# Altium PCB JacdacTactEcBc30 132.PcbDoc
Units mm, origin at the board's own origin, x right, y up, seen from the top; angles counter-clockwise.
Board outline 16.5 x 25 mm, 2 copper layers (Top Layer, Bottom Layer), stack 1.525 mm thick; 20 components, 10 nets, 61 pads, 11 vias.
Unrouted connection lines stored in the file: 10.
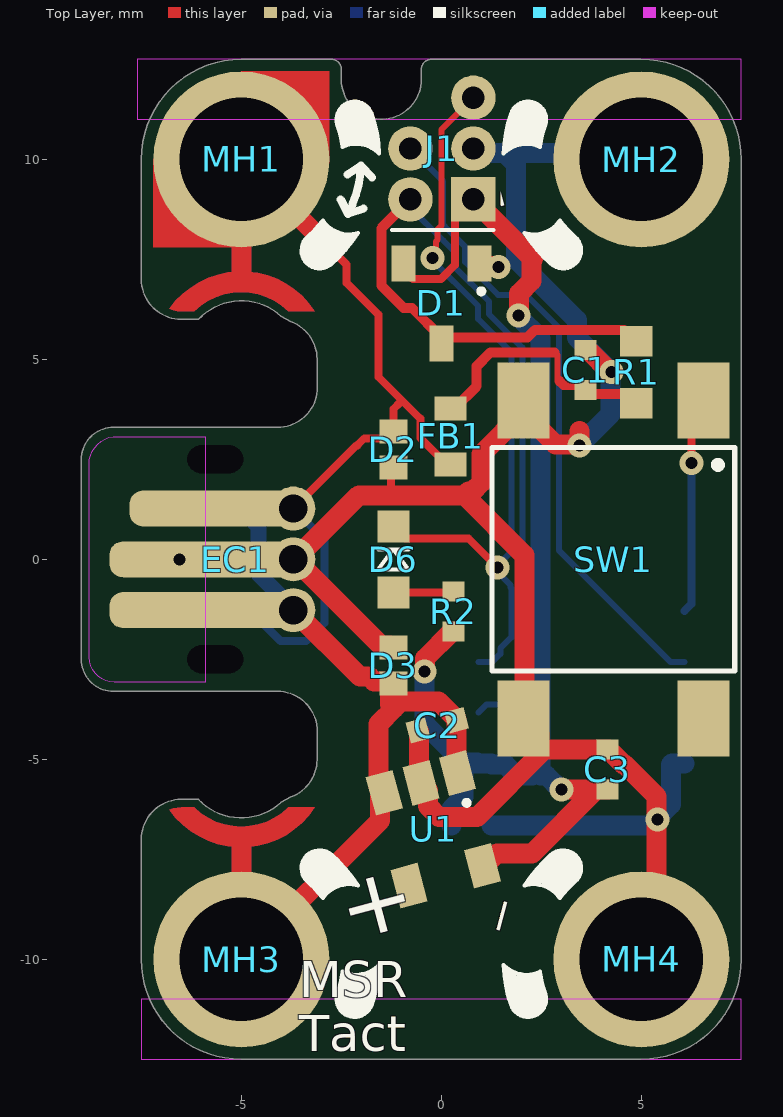
[diagram p0: Top Layer view]
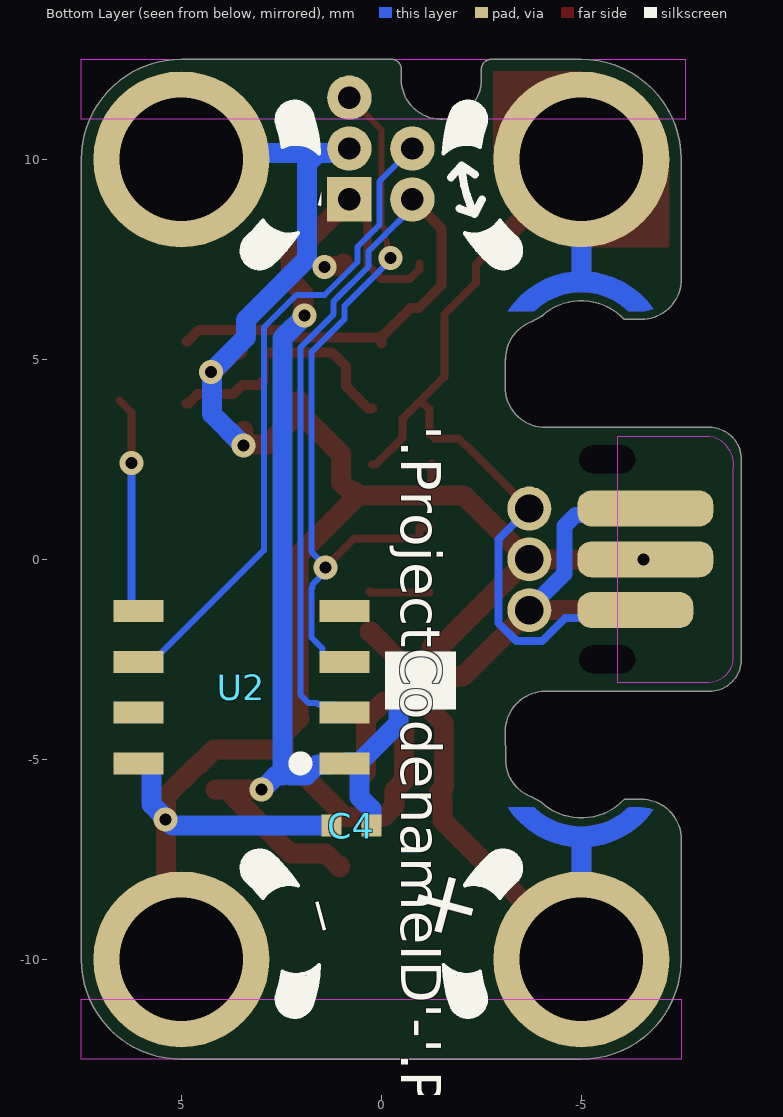
[diagram p1: Bottom Layer view, seen from below]
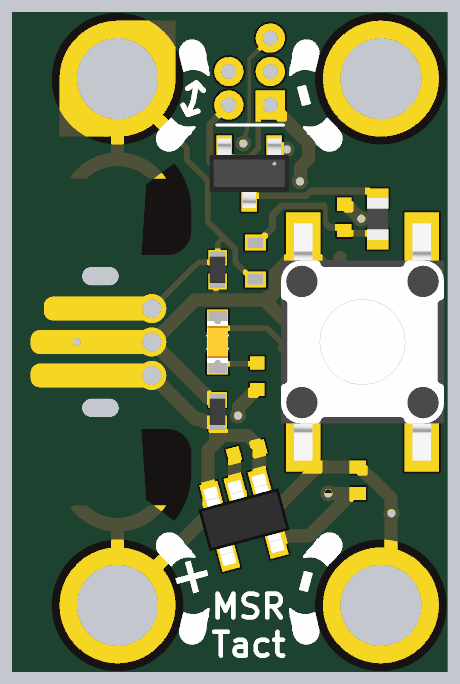
[diagram p2: 3D render of the assembled board from above, using the file's embedded part models]

## Layer stack, top to bottom
Top Solder: solder mask 0.0102, Solder Resist, Dk 3.5
Top Layer: signal copper 0.0356
Dielectric 1: core 1.454, FR-4, Dk 4.2
Bottom Layer: signal copper 0.0356
Bottom Solder: solder mask 0.0102, Solder Resist, Dk 3.5

## Board outline
-7.5,-10 -7.5,-6.97 -7.5,-7 cw(c-6.5,-7) -6.5,-6 -6.5,-6.001 -6.069,-6.001 ccw(c-5,-5) -4.009,-6.079 -4.01,-6.077 -3.76,-5.94 ccw(c-4.099,-5.007) -3.107,-5.007 -3.1,-4.3 ccw(c-4.1,-4.3) -4.1,-3.3 -8.2,-3.3 cw(c-8.2,-2.5) -9,-2.5 -9,2.5 cw(c-8.2,2.5) -8.2,3.3 -4.1,3.3 -4.098,3.3 ccw(c-4.098,4.3) -3.098,4.3 -3.1,4.3 -3.1,5 -3.107,5.007 ccw(c-4.099,5.007) -3.76,5.94 -4.01,6.077 -4.009,6.079 ccw(c-5,5) -6.069,6.001 -6.5,6.001 -6.5,6 cw(c-6.5,7) -7.5,7 -7.5,6.97 -7.5,10 cw(c-5,10) -5,12.5 -2.75,12.5 cw(c-2.75,12.25) -2.5,12.25 -2.5,12 ccw(c-1.5,12) -0.5,12 -0.5,12.25 cw(c-0.25,12.25) -0.25,12.5 5,12.5 cw(c5,10) 7.5,10 7.5,-10 cw(c5,-10) 5,-12.5 -5,-12.5 cw(c-5,-10)

## Design rules (kind name [scope] priority, off if disabled: settings)
AssemblyTestPointUsage [All] p1: valid=2
BoardOutlineClearance [Not (OnLayer('Component Keepout'))] p1: gap=0.3 ignorepadtopadclearanceinfootprint=FALSE except(0: Arc-SplitContinuation Track-SplitContinuation SMDPad-SplitContinuation THPad-SplitContinuation Via-SplitContinuation Fill-SplitContinuation Poly-SplitContinuation Region-OutlineEdge Region-SplitContinuation Text-OutlineEdge Text-SplitContinuation; 0.2: Track-OutlineEdge Fill-CavityEdge Fill-CutoutEdge Fill-SplitBarrior Poly-CavityEdge Poly-CutoutEdge Poly-SplitBarrior Text-CavityEdge Text-CutoutEdge Text-SplitBarrior; 0.25: SMDPad-OutlineEdge)
Clearance [All] p1: gap=0.125 ignorepadtopadclearanceinfootprint=FALSE except(0: Arc-Hole Track-Hole SMDPad-Hole THPad-Hole Via-Hole Fill-Hole Poly-Hole Region-Hole Text-Hole)
ComponentClearance [All] p1: gap=0.1 collisioncheckmode=3 verticalgap=0.254 showdistances=FALSE
DiffPairsRouting [All] p1: maxlimit=2 minlimit=0.15 mostfreqgap=0.15 toplayer_minwidth=0.15 toplayer_maxwidth=2 toplayer_prefwidth=0.15 bottomlayer_minwidth=0.15 bottomlayer_maxwidth=2 bottomlayer_prefwidth=0.15 substack1={CB9D278B-8BF5-444A-AAF4-837A2A9DF42D} toplayer_{cb9d278b-8bf5-444a-aaf4-837a2a9df42d}_minwidth=0.381 toplayer_{cb9d278b-8bf5-444a-aaf4-837a2a9df42d}_maxwidth=0.381 toplayer_{cb9d278b-8bf5-444a-aaf4-837a2a9df42d}_prefwidth=0.381 bottomlayer_{cb9d278b-8bf5-444a-aaf4-837a2a9df42d}_minwidth=0.381 bottomlayer_{cb9d278b-8bf5-444a-aaf4-837a2a9df42d}_maxwidth=0.381 bottomlayer_{cb9d278b-8bf5-444a-aaf4-837a2a9df42d}_prefwidth=0.381 substack2={826B8647-A721-4255-895A-19F9591B9CD1} toplayer_{826b8647-a721-4255-895a-19f9591b9cd1}_minwidth=0.381 toplayer_{826b8647-a721-4255-895a-19f9591b9cd1}_maxwidth=0.381 toplayer_{826b8647-a721-4255-895a-19f9591b9cd1}_prefwidth=0.381 bottomlayer_{826b8647-a721-4255-895a-19f9591b9cd1}_minwidth=0.381 bottomlayer_{826b8647-a721-4255-895a-19f9591b9cd1}_maxwidth=0.381 bottomlayer_{826b8647-a721-4255-895a-19f9591b9cd1}_prefwidth=0.381 substack3={E64FCAF4-1BC8-437D-B1E0-0E5F2DC0F59E} toplayer_{e64fcaf4-1bc8-437d-b1e0-0e5f2dc0f59e}_minwidth=0.381 toplayer_{e64fcaf4-1bc8-437d-b1e0-0e5f2dc0f59e}_maxwidth=0.381 toplayer_{e64fcaf4-1bc8-437d-b1e0-0e5f2dc0f59e}_prefwidth=0.381 bottomlayer_{e64fcaf4-1bc8-437d-b1e0-0e5f2dc0f59e}_minwidth=0.381 bottomlayer_{e64fcaf4-1bc8-437d-b1e0-0e5f2dc0f59e}_maxwidth=0.381 bottomlayer_{e64fcaf4-1bc8-437d-b1e0-0e5f2dc0f59e}_prefwidth=0.381 substack4={E61CE66C-507C-4E1E-8E83-C905434AFC1C} toplayer_{e61ce66c-507c-4e1e-8e83-c905434afc1c}_minwidth=0.381 toplayer_{e61ce66c-507c-4e1e-8e83-c905434afc1c}_maxwidth=0.381 toplayer_{e61ce66c-507c-4e1e-8e83-c905434afc1c}_prefwidth=0.381 bottomlayer_{e61ce66c-507c-4e1e-8e83-c905434afc1c}_minwidth=0.381 bottomlayer_{e61ce66c-507c-4e1e-8e83-c905434afc1c}_maxwidth=0.381 bottomlayer_{e61ce66c-507c-4e1e-8e83-c905434afc1c}_prefwidth=0.381 maxuncoupledlength=25
FabricationTestPointUsage [All] p1: valid=2 allowmultiple=FALSE
HoleSize [All] p1: absolutevalues=TRUE maxlimit=3.1 minlimit=0.2 maxpercent=80.000 minpercent=20.000
MinimumSolderMaskSliver [All] p1: minsoldermaskwidth=0.005
PasteMaskExpansion [All] p1: expansion=-35 percent=-35.000000
PlaneClearance [All] p1: clearance=0.3
PlaneConnect [All] p1: planeconnectstyle=Relief reliefexpansion=0.5 reliefentries=4 reliefconductorwidth=0.2 reliefairgap=0.3
PolygonConnect "PolygonConnect GND" [isVIA] p1: connectstyle=Relief reliefconductorwidth=0.2 reliefentries=4 polygonreliefangle="90 Angle" airgapwidth=0.2
PolygonConnect [All] p2: connectstyle=Relief reliefconductorwidth=0.2 reliefentries=4 polygonreliefangle="90 Angle" airgapwidth=0.2
RoutingVias [All] p1: holewidth=0.3 width=0.6 viastyle="Through Hole" minholewidth=0.3 minwidth=0.6 maxholewidth=0.5 maxwidth=0.8
SilkToSilkClearance [All] p1: silktosilkclearance=0.001
SilkToSolderMaskClearance [IsPad] p1: minsilkscreentomaskgap=0.05 clearancetoexposedcopper=TRUE
SolderMaskExpansion [All] p1: expansion=0.075 istentingtop=FALSE
Width [All] p1: maxlimit=2 minlimit=0.15 preferedwidth=0.15 substack1={CB9D278B-8BF5-444A-AAF4-837A2A9DF42D} substack2={826B8647-A721-4255-895A-19F9591B9CD1} substack3={E64FCAF4-1BC8-437D-B1E0-0E5F2DC0F59E} substack4={E61CE66C-507C-4E1E-8E83-C905434AFC1C} minimp=50.000000 maximp=50.000000 favimp=50.000000
19 further rules are at their usual default settings.

## Components (designator, comment, footprint, x,y, rotation, side; value= is the part's Value field where it differs from the comment)
C1 "CL05C330JB5NNNC" "C0402_0.55MM - without outline" 3.601,4.733 r270 top
C2 "CL05A105KP5NNNC" "C0402_0.55MM - without outline" -0.1,-4.15 r15 top
C3 "CL05A105KP5NNNC" "C0402_0.55MM - without outline" 4.15,-5.25 r270 top
C4 "CL05A105KP5NNNC" "C0402_0.55MM - without outline" 0.751,-6.657 r180 bottom
D1 "BAT54S" "NXP-BAT54S-TO-236AB - WITHOUT OUTLINE" 0,6.4 r270 top
D2 "RCLAMP0521P-N" "TVS 0402 - XL" -1.2,2.75 r270 top
D3 "RCLAMP0521P-N" "TVS 0402 - XL" -1.2,-2.65 r90 top
D6 "Everlight Elec'''" "0603 Orange - without outline" -1.2,0 r270 top
EC1 "3 pin JACDAC edge connector" JACDAC_EDGE_CONNECTOR_NO_TRACES_3D_PADS -3.15,0 r90 top
FB1 "TDK MPZ1608S102ATA00" "TDK MPZ1608 0.8mm - without outline" 0.23,3.075 r90 top
J1 "Hack Connect Mini 1.27 mm pitch 2-row" HACK_CONNECT_MINI_5_X_1_27_0.559mm_TH 0.8,9 r0 top
MH1 "MH_7.0MMK_4.4MMC_3.1MMD_PTH" MH_7.0MMK_4.4MMC_3.1MMD_PTH-SILK_D -5,10 r30 top
MH2 "MH_7.0MMK_4.4MMC_3.1MMD_PTH" MH_7.0MMK_4.4MMC_3.1MMD_PTH-SILK_G 5,10 r60 top
MH3 "MH_7.0MMK_4.4MMC_3.1MMD_PTH" MH_7.0MMK_4.4MMC_3.1MMD_PTH-SILK_P -5,-10 r330 top
MH4 "MH_7.0MMK_4.4MMC_3.1MMD_PTH" MH_7.0MMK_4.4MMC_3.1MMD_PTH-SILK_G 5,-10 r30 top
R1 "220R" RC0603 4.876,4.672 r270 top
R2 "RC0402FR-071KL" "R0402 - Without outline" 0.301,-1.3 r270 top
SW1 "Tact Wurth 430152050826" "Wurth 430152050836-WIDE" 4.3,0 r270 top
U1 "LDO 3.3V/300 mA" "ON_SEMI-SOT23-5 - WITHOUT OUTLINE" -0.2,-6.75 r285 top
U2 "PFS122-S08" SOP-8 3.5,-3.2 r0 bottom

## Footprints (in the part's own frame and the unit in brackets; to place one, negate y for a bottom-side part, rotate by r counter-clockwise, add the part's x,y. Pads: shape width x height; smd on the part's side, far side on the other; paste and mask are expansions set on the pad)
"0603 Orange - without outline" [mm]
  rect 0.8x0.8 smd paste-0.05: 1(-0.825,0) 2(0.825,0)
  silkscreen extent -0.25,-0.38 0.25,0.38, body extent -0.8,-0.4 0.8,0.4, height 0.54
"C0402_0.55MM - without outline" [mm]
  rect 0.5x0.55 smd: 1(-0.5,0) 2(0.5,0)
  body extent -0.5,-0.25 0.5,0.25, height 0.55
HACK_CONNECT_MINI_5_X_1_27_0.559mm_TH [mm] "50mil by 62mil pitch 22mil TH"
  rect 1.11x1.11 hole 0.559: 1(0,0)
  round 1.11 hole 0.559: 2(-1.575,0) 3(0,1.27) 4(-1.575,1.27) 5(0,2.54)
  silkscreen extent -2.03,-0.76 0.51,-0.76
JACDAC_EDGE_CONNECTOR_NO_TRACES_3D_PADS [mm] "Jacdac 3 pin connector with no traces and with 3D bodies for the copper"
  rrect78% 0.9x2.9 smd far side paste-1 mask+0: 1(-1.27,3.2)
  rrect78% 0.9x4.3 smd paste-1 mask+0: 1(1.27,2.5)
  round 1.1 hole 0.71 paste-0.254 mask+0: 1(1.27,0.55) 2(0,0.55) 3(-1.27,0.55)
  rrect78% 0.9x3.4 smd far side paste-1 mask+0: 2(0,3.45) 2(0,3.45) 3(1.27,3.45)
  rrect78% 0.9x4.8 smd paste-1 mask+0: 2(0,2.75) 3(-1.27,2.75)
  round 0 hole 0.7 slot 1.4 at 90 deg unplated mask+0: ""(-2.5,2.5) ""(2.5,2.5)
  Top Layer keep-out region: -3.075,2.75 -3.07,5.033 -2.987,5.341 -2.761,5.567 -2.453,5.65 -2.453,5.65 2.27,5.65 2.545,5.635 2.794,5.516 2.978,5.31 3.07,5.05 3.07,5.05 3.07,2.75
  Bottom Layer lines w0.2: -1.27,0.85 -1.126,0.85
  Bottom Layer keep-out region: -3.07,2.75 -3.07,5.033 -3.023,5.269 -2.889,5.469 -2.689,5.603 -2.453,5.65 -2.453,5.65 2.27,5.65 2.546,5.635 2.794,5.516 2.978,5.31 3.07,5.05 3.07,5.05 3.07,2.75
  body extent -1.83,0 1.83,5.15, height 0.01
MH_7.0MMK_4.4MMC_3.1MMD_PTH-SILK_D [mm] "Jacdac mounting hole 7.0mm clearance, 4.4 annualar ring and 3.1mm PTH"
  round 4.4 hole 3.08 mask+0.3: 1(0,0)
  silkscreen extent 0.1,-3.4 3.4,-0.1, body extent -2.21,-3.41 3.41,2.21, height 0.01
MH_7.0MMK_4.4MMC_3.1MMD_PTH-SILK_G [mm] "Jacdac mounting hole 7.0mm clearance, 4.4 annualar ring and 3.1mm PTH"
  round 4.4 hole 3.08 mask+0.3: 1(0,0)
  silkscreen extent -3.4,0.1 -0.1,3.4, body extent -3.41,-2.21 2.2,3.41, height 0.01
MH_7.0MMK_4.4MMC_3.1MMD_PTH-SILK_P [mm] "Jacdac mounting hole 7.0mm clearance, 4.4 annualar ring and 3.1mm PTH"
  round 4.4 hole 3.08 mask+0.3: 1(0,0)
  silkscreen extent 0.1,0.1 3.4,3.4, body extent -2.21,-2.21 3.41,3.41, height 0.01
"NXP-BAT54S-TO-236AB - WITHOUT OUTLINE" [mm] "SOT23, 3-Leads, Body 2.90x2.30mm, Pitch 0.95mm, IPC Medium Density"
  rect 0.9x0.6 smd: 1(-1,0.95) 2(-1,-0.95) 3(1,0)
  silkscreen extent -0.35,0.95 -0.25,1.05, body extent -1.32,-1.5 1.32,1.5, height 1.12
"ON_SEMI-SOT23-5 - WITHOUT OUTLINE" [mm]
  rect 1x0.7 smd: 1(-1.2,0.95) 2(-1.2,0) 3(-1.2,-0.95) 4(1.2,-0.95) 5(1.2,0.95)
  silkscreen extent -0.47,0.93 -0.38,1.02, body extent -1.5,-1.57 1.5,1.58, height 1.1
"R0402 - Without outline" [mm]
  rect 0.5x0.55 smd: 1(-0.5,0) 2(0.5,0)
  body extent -0.5,-0.25 0.5,0.25, height 0.35
RC0603 [mil]
  rect 30x32 smd: 1(-30.5,0) 2(30.5,0)
  body extent -31,-16 32,16, height 28
SOP-8 [mm] "Pitch:1.27mm,Width:150mil"
  rect 1.25x0.55 smd: 1(-2.575,1.905) 2(-2.575,0.635) 3(-2.575,-0.635) 4(-2.575,-1.905) 5(2.575,-1.905) 6(2.575,-0.635) 7(2.575,0.635) 8(2.575,1.905)
  silkscreen extent -1.52,1.85 -1.43,1.95, body extent -3,-2.55 3,2.54, height 1.3
"TDK MPZ1608 0.8mm - without outline" [mm]
  rect 0.6x0.8 smd paste-0.1: 1(-0.7,0) 2(0.7,0)
  body extent -0.8,-0.4 0.8,0.4, height 0.8
"TVS 0402 - XL" [mm] "TVS 0402 RoHS"
  rect 0.6x0.7 smd paste-0.06 mask+0.05: 1(-0.45,0) 2(0.45,0)
  body extent -0.5,-0.3 0.5,0.3, height 0.5
"Wurth 430152050836-WIDE" [mm] "6*6mm vertical type, SMD, height 5.0mm, black actuator, 160gf, T&R"
  rect 1.9x1.3 smd: 1(-3.975,2.25) 2(-3.975,-2.25) 3(3.975,2.25) 4(3.975,-2.25)
  silkscreen extent -2.79,-3.04 2.79,3.04, body extent -4.5,-3.1 4.5,3.1, height 5

## Part data
C1: "CAP CER 33PF 50V C0G/NP0 0402", Capacitance=33pF, Case Code (Imperial)=0402, Case Code (Metric)=1005, Dielectric=C0G, Manufacturer=Samsung, Max Operating Temperature=125°C, Min Operating Temperature=-55°C, Package Quantity=1, Supplier Part Number 1=1276-1272-1-ND, Temperature Coefficient=300ppm/°C, Tolerance=5%, Voltage=50V, Case/Package=0402, Category="Ceramic Capacitors", ComponentLink1Description="Online datasheet", ComponentLink1URL=https://datasheet.ciiva.com/15195/getdatasheetpartid-355282-15195687.pdf, Construction=Flat, Contact Plating=Tin, Depth=0.5mm, Height=0.5mm, Lead Free="Lead Free", Length=1mm, Manufacturer Part Number=CL05C330JB5NNNC, Material=Ceramic, Mount="Surface Mount", Packaging="Tape and Reel", Pricing 1="1=0.10000, 10=0.02300, 50=0.01260, 100=0.01040, 500=0.00740, 1000=0.00582, 2500=0.00529, 5000=0.00487 (USD)", Pricing 2="1=0.12500, 25=0.02900, 100=0.01300, 250=0.01100, 500=0.00900, 1000=0.00600 (USD)", Pricing 3="1=0.10000, 10=0.01400, 50=0.01400, 100=0.01100, 1000=0.00600, 10000=0.00400 (USD)", Pricing 4="150=0.01120, 500=0.00860, 2500=0.00640, 5000=0.00550 (GBP)", Radiation Hardening=No, RoHS=Yes, RoHS Compliant=Yes, Series=CL, Stock 1=5436088, Stock 2=45340, Stock 3=8877, Stock 4=10934, Supplier 1=Digi-Key, Supplier 2=Newark, Supplier 3=Mouser, Supplier 4=Farnell, Supplier Part Number 2=82AC9259, Supplier Part Number 3=187-CL05C330JB5NNNC, Supplier Part Number 4=3013373RL, Thickness=0.022inch, Voltage Rating=50V, Voltage Rating (DC)=50V, Width=0.02inch
C2 C3 C4: "CAP CER 1UF 10V X5R 0402", Capacitance=1µF, Case Code (Imperial)=0402, Case Code (Metric)=1005, Dielectric=X5R, Manufacturer=Samsung, Max Operating Temperature=85°C, Min Operating Temperature=-55°C, Package Quantity=1, Supplier Part Number 1=1276-1076-1-ND, Tolerance=10%, Voltage Rating=10V, Case/Package=0402, Category=Capacitors, Checked=?, ComponentLink1Description="Online datasheet", ComponentLink1URL=https://datasheet.ciiva.com/15195/getdatasheetpartid-358390-15195630.pdf, Contact Plating=Tin, Created=DG, Depth=0.5mm, Height=0.5mm, Length=1mm, Manufacturer Part Number=CL05A105KP5NNNC, Material=Ceramic, Mount="Surface Mount", Packaging="Tape and Reel", Pricing 1="1=0.10000, 10=0.03900, 50=0.02100, 100=0.01720, 500=0.01228, 1000=0.00965, 2500=0.00877, 5000=0.00807 (USD)", Pricing 2="1=0.10000, 10=0.04200, 100=0.01800, 500=0.01300, 1000=0.01000, 2500=0.00900 (USD)", Pricing 3="10=0.02450, 100=0.02000, 500=0.01310, 2500=0.00920, 5000=0.00810, 10000=0.00640, 50000=0.00490 (GBP)", Radiation Hardening=No, RoHS=Yes, Stock 1=5705569, Stock 2=928941, Stock 3=53670, Supplier 1=Digi-Key, Supplier 2=Mouser, Supplier 3=Farnell, Supplier Part Number 2=187-CL05A105KP5NNNC, Supplier Part Number 3=3013329, Thickness=0.022inch, Width=0.02inch
D1: "DIODE ARRAY SCHOTTKY 30V SOT23", Manufacturer=Nexperia, Manufacturer Part Number=BAT54S,235, Supplier Part Number 1=1727-1868-1-ND, Category="Rectifier Diodes", ComponentLink1Description="NXP datasheet online", ComponentLink1URL=https://assets.nexperia.com/documents/data-sheet/BAT54_SER.pdf, Pricing 1="1=0.13000, 10=0.11900, 100=0.05610, 500=0.03326, 1000=0.02185, 5000=0.02138 (USD)", RoHS=No, Stock 1=14011, Supplier 1=Digi-Key, Supplier 2=Mouser, Supplier 3=RSComponents, Supplier Part Number 2=771-BAT54S235, Supplier Part Number 3=1707990
D2 D3: "Bidirectional 5V (Max) 6V 16V 3.5A (8/20us) 0402 TVS RoHS", Manufacturer="Born Semiconductor", Package=0402, Supplier1 Part Number=C316043, Checked By=?, ComponentLink1Description="Online datasheet", ComponentLink1URL=https://datasheet.lcsc.com/szlcsc/Bourne-Semicon-Shenzhen-RCLAMP0521P-N_C316043.pdf, Created By="D Gakure", Manufacturer Part Number=RCLAMP0521P-N, Supplier1=LCSC
D6: library part 19-217/S2C-AQ1R1B/3T, "LED ORANGE DIFFUSED 1608 SMD", Case Code (Imperial)=0603, Case Code (Metric)=1608, Color=Orange, Forward Voltage=2.05V, Lens Color=White, Manufacturer="Everlight Elec", Supplier 1 Part Number=C146215, Test Current=25mA, Case/Package=0603, Category=LEDs, Colour=Orange, ComponentLink1Description="Online datasheet", ComponentLink1URL=https://datasheet.lcsc.com/lcsc/1912171731_Everlight-Elec-19-217-S2C-AQ1R1B-3T_C146215.pdf, Dominant Wavelength=605nm, Height=0.65mm, Lead Free="Lead Free", Length=1.6mm, Lens Transparency=Diffused, Luminous Intensity=100mcd, Manufacturer Part Number=19-217/S2C-AQ1R1B/3T, Mount="Surface Mount", RoHS=Yes, Supplier 1=LCSC, Width=0.8mm
EC1: library part "Jacdac edge connector", "3 pin Jacdac edge connector 1.27mm pitch", Manufacturer Part Number=JACDAC_EDGE_CONNECTOR, Checked By=?, ComponentLink1Description="Yuliang JACDAC cable connector drawing online", ComponentLink1URL=https://github.com/microsoft/jacdac-mdk/blob/main/connector/JACDAC-Connector-by-Yuliang-2020-11-28.pdf, ComponentLink2Description="JACDAC PCB edge connector spec onlin", ComponentLink2URL=https://github.com/microsoft/jacdac-mdk/blob/main/connector/JACDAC_PCB_Edge_Connector_Drawing_JD-PEC-01_rev_01.pdf, Created By="D. Gakure", PCB Type="1.6mm FR4"
FB1: "0603 1k@100MHz 0.8A chip", Case Code (Imperial)=0603, Case Code (Metric)=1608, Current Rating=800mA, DC Resistance (DCR)=300mR, Manufacturer=TDK, Manufacturer Part Number=MPZ1608S102ATA00, Package Quantity=4000, Supplier Part Number 1=445-8694-1-ND, Tolerance=25%, Case/Package=0603, ComponentLink2Description="datasheet online", ComponentLink2URL=https://www.mouser.co.uk/datasheet/2/400/eads_commercial_power_mpz1608_en-923650.pdf, ComponentLink3Description=datasheet, ComponentLink3URL="Y:\System\Altium\Libraries 2014\TDK\Datasheets\eads_commercial_power_mpz1608_en-923650.pdf", Core Material=Ferrite, Height=0.037inch, Impedance="1kR @ 100MHz", Length=0.063inch, Max DC Current=800mA, Mount="Surface Mount", Packaging="Tape and Reel", Pricing 1="1=0.1, 10=0.079, 25=0.0716, 50=0.0644, 100=0.0472, 250=0.03432, 500=0.03146, 1000=0.02717 (USD)", Stock 1=113542, Supplier 1=Digi-Key, Supplier 2=Mouser, Supplier Part Number 2=810-MPZ1608S102ATA00, Width=0.031inch
J1: library part HACK_CONNECT_MINI
MH1 MH2 MH3 MH4: "Mounting Hole 7.0mm keepout, 4.4mm annualar ring and 3.1mm Drill PTH", Annular Ring=4.4mm, Hole Clearance=7.0mm, Hole Diameter=3.1mm, Hole Size=M3, Hole Type=PTH
R1: library part RC0603FR-07220RL, "Res Thick Film 0603 220 Ohm 1% 0.1W(1/10W) ±100ppm/°C Pad SMD T/R", Case Code (Imperial)=0603, Case Code (Metric)=1608, Manufacturer="= Manufacturer 1", Manufacturer 1="=\"Manufacturer\"", Manufacturer Part Number="= Manufacturer Part Number 1", Manufacturer Part Number 1="=\"Manufacturer Part Number\"", Max Operating Temperature=155°C, Max Power Dissipation=100mW, Min Operating Temperature=-55°C, Package Quantity=1, Resistance Tolerance=1%, Resistor Type="Thick Film", Supplier Part Number 1=311-220HRCT-ND, Temperature Coefficient=100ppm/°C, Voltage Rating=50V, Case/Package=0603, Category="Chip SMD Resistors", Comment 1=5%, Comment 2=>0.12W, ComponentLink4Description="online datasheet", ComponentLink4URL=https://datasheet.ciiva.com/46395/443971-46395002.pdf, Construction=Rectangular, Depth=0.8mm, Features="Moisture Resistant", Height=0.022inch, Lead Free="Lead Free", Length=1.6mm, Military Standard=Not, Number of Pins=2, Number of Terminations=2, Packaging="Tape and Reel", Power Rating=100mW, Pricing 1="1=0.10000, 10=0.02300, 100=0.00930, 1000=0.00417, 2500=0.00362 (USD)", REACH SVHC="No SVHC", Resistance=220R, RoHS=Yes, RoHS Compliant=Yes, Series=RC, Size Code=0603, Stock 1=1257522, Supplier 1=Digi-Key, Supplier 2=Farnell, Supplier 3=Mouser, Supplier 4=RSComponents, Supplier Part Number 2=2421863, Supplier Part Number 3=603-RC0603FR-07220RL, Supplier Part Number 4=1995497, Termination=SMD/SMT, Tolerance=1%, Voltage Rating (DC)=50V, Width=0.031inch
R2: "RES SMD 1K OHM 1% 1/16W 0402", Case Code (Imperial)=0402, Case Code (Metric)=1005, Manufacturer=Yageo, Max Operating Temperature=155°C, Min Operating Temperature=-55°C, Power Rating=62.5mW, Resistance=1k, Resistor Type="Thick Film", Supplier Part Number 1=311-1.00KLRDKR-ND, Temperature Coefficient=100ppm/°C, Tolerance=1%, Voltage Rating=50V, Case/Package=0402, Category=Resistors, Checked=?, ComponentLink2Description="Online datasheet", ComponentLink2URL=https://datasheet.ciiva.com/12666/pyu-rc0402-51-rohs-l-6-r-12666741.pdf, Created=D.G, Depth=0.5mm, Height=0.32mm, Lead Free="Lead Free", Length=1mm, Manufacturer Part Number=RC0402FR-071KL, Military Standard=Not, Number of Pins=2, Packaging="Tape and Reel", Pricing 1="1=0.10000, 10=0.01400, 100=0.00580, 1000=0.00262, 2500=0.00228, 5000=0.00188 (USD)", Pricing 2="1=0.10000, 10=0.01200, 100=0.00400, 1000=0.00400, 2500=0.00400, 10000=0.00300 (USD)", Pricing 3="1=0.08130, 25=0.01210, 100=0.01120, 250=0.01030, 500=0.00900 (GBP)", REACH SVHC=Unknown, RoHS=Yes, Stock 1=37591306, Stock 2=11912978, Stock 3=29900, Supplier 1=Digi-Key, Supplier 2=Mouser, Supplier 3=Farnell, Supplier Part Number 2=603-RC0402FR-071KL, Supplier Part Number 3=2132441, Termination=SMD/SMT, Voltage Rating (DC)=50V, Width=0.5mm
SW1: "6x6mm SPST 0.05A 12VDC SMD 260gf", Contact Current Rating=50mA, Manufacturer="Wurth Electronics", Manufacturer Part Number=430152050826, Max Operating Temperature=85°C, Min Operating Temperature=-40°C, Operating Force=260gf, Supplier Part Number 1=732-6993-1-ND, Actuator Length=1.6mm, Actuator Material="Polymer,Liquid Crystal Polymer", Actuator Type=Standard, ComponentLink1Description="Online datasheet", ComponentLink1URL=http://www.farnell.com/datasheets/1910150.pdf, Contact Material="Stainless Steel,Steel", Current Rating=50mA, Height=5mm, Illumination Type=Non-Illuminated,Illuminated, Length=6.2mm, Mechanical Life=200000Cycles, Mount="Surface Mount", Packaging="Tape and Reel", Pricing 1="1=0.47, 500=0.38232 (USD)", REACH SVHC="No SVHC", Stock 1=2282, Supplier 1=Digi-Key, Supplier 2=Farnell, Supplier 3=RSComponents, Supplier Part Number 2=2065110, Supplier Part Number 3=7856213, Switch Function=Off-Mom, Switch Travel=0.25mm, Termination="Gull Wing", Throw Configuration=SPST, Width=6.2mm
U1: library part NCP114BSN330T1G, "CMOS Low Dropout Regulator (LDO), 300 mA 3.3V, Non-Active Discharge, TSOP5", Case/Package=TSOP, Manufacturer="ON Semiconductor", Max Input Voltage=5.5V, Max Operating Temperature=85°C, Max Output Current=300mA, Min Input Voltage=1.7V, Min Operating Temperature=-40°C, Output Voltage=3.3V, Quiescent Current=50uA, Supplier Part Number 1=NCP114BSN330T1GOSCT-ND, Accuracy=2%, Category="Voltage Regulators - Linear", ComponentLink1Description="Datasheet (online)", ComponentLink1URL=http://www.farnell.com/datasheets/2118270.pdf?src-supplier=Farnell, Lead Free="Lead Free", Manufacturer Part Number=NCP114BSN330T1G, Mount="Surface Mount", Number of Outputs=1, Number of Pins=5, Output Type=Fixed, Polarity=Positive, Pricing 1="1=0.45000, 10=0.33700, 25=0.29440, 100=0.19060, 250=0.15780, 500=0.12624, 1000=0.09679 (USD)", RoHS=Yes, RoHS Compliant=Yes, Stock 1=4067, Supplier 1=Digi-Key, Supplier 2=Mouser, Supplier 3=RSComponents, Supplier Part Number 2=863-NCP114BSN330T1G, Supplier Part Number 3=1263179
U2: library part PFS122-SO8, "8bit MTP MCU with 12-bit ADC", Manufacturer=PADAUK, Package=SOP-8, ComponentLink1Description="Online datasheet", ComponentLink1URL=http://www.padauk.com.tw/upload/doc/PFS122%20datasheet_EN_V001_20220518.pdf, Manufacturer Part Number=PFS122-S08

## Via types
v1: diameter 0.6, hole 0.3, Top Layer to Bottom Layer, tented both sides, 11 vias

## Nets (pads, with @x,y where several pads share a name; then routed paths per layer and width w, separated by ;. In a path a pad name is that pad's centre, name@x,y a point inside that pad or via, vN(x,y) a via of type N, cw(c..) or ccw(c..) an arc to the next point about the centre after c; other vN are vias at no path point)
3V3: C3.2 C4.2 D1.2 J1.1 R2.2 U1.5 U2.1 | length 32.4
  Top Layer w0.2: D1.2 -0.95,7.25 -0.711,7.011 -0.008,7.011 0.345,7.364 0.345,8.545 J1.1
  Top Layer w0.5: v1(-0.425,-2.8) -0.406,-2.781 -0.406,-2.482 0.276,-1.8 R2.2 ; J1.1 2.286,7.514 2.255,7.482 2.255,6.956 1.945,6.646 1.945,6.119 v1(1.926,6.1) ; U1.5 1.028,-7.688 1.044,-7.704 1.393,-7.355 2.27,-7.355 3.875,-5.75 ; v1(3,-5.75) 3.046,-5.75 3.875,-5.75 ; C3.2 3.875,-5.75
  Bottom Layer w0.5: v1(-0.425,-2.8) -0.425,-4.105 0.55,-5.08 0.9,-5.08 U2.1 ; C4.2 0.251,-6.241 0.55,-5.942 0.55,-5.13 0.575,-5.105 U2.1@1.251,-5.105 ; U2.1@1.251,-5.13 1.6,-5.13 1.875,-5.405 2.275,-5.405 2.451,-5.229 2.475,-5.205 2.475,5.524 1.926,6.073 v1(1.926,6.1) ; 2.475,-5.405 2.628,-5.405 2.973,-5.75 v1(3,-5.75)
BUTTON: SW1.1 U2.5 | length 5.5
  Top Layer w0.2: v1(6.25,2.408) 6.25,3.675 SW1.1
  Bottom Layer w0.2: U2.5 6.25,-1.12 v1(6.25,2.408)
GND: C1.1 C2.1 C3.1 C4.1 D1.1 D2.2 D3.2 EC1.2 J1.3 MH2.1 MH4.1 SW1.2 SW1.4 U1.2 U2.8 | length 57.5
  Top Layer w0.2: -1.258,1.6 -1.258,2.3 -1.258,2.392 -1.2,2.334 D2.2 ; D3.2@-1.25,-2.2 D3.2
  Top Layer w0.5: EC1.2@-5.9,0 -3.7,0 EC1.2@-3.662,0 ; D3.2@-1.25,-2.2 -1.3,-2.15 -1.512,-2.15 EC1.2@-3.662,0 ; C2.1 -0.563,-4.299 -0.563,-5.539 -0.328,-5.774 -0.328,-6.173 -0.057,-6.444 0.895,-6.444 2.557,-4.782 2.589,-4.75 C3.1 ; D1.1 0.95,7.33 1.406,7.33 v1(1.425,7.311) ; SW1.2 SW1.2@2.05,3.675 ; SW1.4@2.45,-4.75 2.45,-4.375 SW1.4 2.075,-3.95 2.075,0.105 0.58,1.6 ; v1(3.45,2.85) 3.431,2.869 2.856,2.869 SW1.2@2.05,3.675 ; v1@3.45,2.877 3.45,3.208 ; C1.1 3.672,5.233 4.226,4.679 v1(4.253,4.679) ; C3.1@4.175,-4.75 4.55,-5.125 4.58,-5.125 5.381,-5.926 5.381,-6.481 v1(5.4,-6.5) 5.381,-6.519 5.381,-9.619 MH4.1 ; EC1.2@-3.662,0 -2.062,1.6 -1.258,1.6 0.58,1.6 ; 0.58,1.6 0.68,1.7 0.785,1.7 1.005,1.92 1.005,2.63 SW1.2@2.05,3.675
  Bottom Layer w0.5: J1.3 0.917,10.153 1.599,10.153 ; C4.1 5.216,-6.657 5.373,-6.5 v1(5.4,-6.5) 5.4,-6.473 5.743,-6.13 5.743,-5.13 5.768,-5.105 U2.8 ; v1(3.45,2.85) 4.234,3.634 4.234,4.665 v1@4.241,4.672 ; v1(4.253,4.679) 3.387,5.545 3.387,5.982 1.862,7.507 1.862,9.891 1.599,10.153 ; MH2.1 4.847,10.153 1.599,10.153
  other v1: -6.55,0
ICPCK: J1.4 U2.6 | length 16.3
  Bottom Layer w0.15: J1.4 0.045,9.45 0.045,8.362 0.162,8.245 0.596,7.811 0.596,7.433 1.421,6.608 2.125,6.608 2.937,5.796 2.937,0.223 5.725,-2.565 U2.6
JD_DATA: D2.1 EC1.1 FB1.1 MH1.1 | length 26.5
  Top Layer w0.2: EC1.1@-3.7,1.27 -2.12,2.85 -2.1,2.85 -1.925,3.025 -1.325,3.025 D2.1@-1.25,3.1 ; -2.697,7.697 -2.369,7.369 -2.369,6.913 -1.575,6.119 -1.575,4.563 -0.526,3.514 -0.526,3.031 0.13,2.375 FB1.1 ; D2.1@-1.2,3.125 D2.1 -1.2,3.754 -1.033,3.921
  Top Layer w0.5: -5,7 -5,9 MH1.1@-5,9.434 ; MH1.1 -4.833,9.833 -2.697,7.697
  Bottom Layer w0.2: EC1.1@-6.35,-1.27 -6.155,-1.465 -4.592,-1.465 ; -4.597,-1.469 -4.021,-2.045 -3.379,-2.045 -2.925,-1.591 -2.925,0.495 EC1.1@-3.7,1.27
  Bottom Layer w0.5: -5,7 MH1.1
JD_DATA_MCU/ICPDA: D1.3 J1.2 R1.1 U2.2 | length 24.5
  Top Layer w0.25: J1.2 -1.5,8.275 -1.5,6.846 -0.939,6.286 -0.736,6.286 D1.3@0,5.55 ; D1.3 D1.3@0,5.55 ; R1.1 4.85,5.447 4.564,5.733 2.337,5.733 2.153,5.55 D1.3@0,5.55
  Bottom Layer w0.15: J1.2 -0.775,8.793 0.048,7.97 0.321,7.697 0.321,7.319 1.192,6.448 1.192,6.127 2.025,5.293 2.025,-3.385 1.812,-3.598 1.612,-3.598 1.575,-3.635 1.125,-3.635 U2.2
JD_PWR: C2.2 D3.1 EC1.3 MH3.1 U1.1 U1.3 | length 27.9
  Top Layer w0.5: EC1.3@-5.9,-1.27 -3.7,-1.27 -2.034,-2.936 -1.8,-2.936 -1.686,-3.05 -1.25,-3.05 D3.1 -1.233,-3.1 -1.283,-3.15 -1.283,-3.628 ; -5,-7 MH3.1 -1.533,-6.533 -1.533,-5.942 U1.3 -1.567,-5.698 -1.567,-4.112 -1.183,-3.728 -1.005,-3.55 -0.07,-3.55 0.383,-4.003 C2.2 0.379,-4.025 0.379,-5.317 U1.1
  Bottom Layer w0.4: EC1.3@-6.6,1.27 -6.443,1.113 -4.857,1.113 -4.575,0.831 -4.575,-0.362 -3.7,-1.237 EC1.3@-3.7,-1.27
  Bottom Layer w0.5: MH3.1 -5,-7
JD_STATUS/ICVPP: D6.1 J1.5 U2.3 | length 19.5
  Top Layer w0.15: v1(-0.225,7.536) -0.139,7.622 -0.139,7.944 -0.091,7.992 -0.091,8.251 0,8.342 0,10.74 J1.5@0.76,11.5
  Top Layer w0.2: D6.1 -1.175,0.8 -0.95,0.8 -0.95,0.575 -0.9,0.525 0.675,0.525 1.4,-0.2 v1(1.4,-0.206)
  Bottom Layer w0.15: v1(-0.225,7.536) -0.237,7.536 -0.261,7.512 0.917,6.334 0.917,6.013 1.75,5.18 1.75,0.192 1.406,-0.152 v1@1.406,-0.206 ; J1.5@0.76,11.5 0.84,11.5 J1.5 ; U2.3 1.275,-2.565 1.475,-2.365 1.475,-2.228 1.75,-1.953 1.75,-0.725 1.725,-0.7 1.725,-0.639 1.4,-0.314 v1(1.4,-0.206)
NetC1_2: C1.2 FB1.2 R1.2 | length 6.4
  Top Layer w0.15: 2.831,5.175 2.9,5.106 2.9,4.512 2.95,4.462
  Top Layer w0.25: FB1.2 0.33,3.775 0.884,4.329 0.884,4.829 1.23,5.175 2.831,5.175 ; 2.95,4.462 3.054,4.358 3.476,4.358 3.706,4.129 4.594,4.129 4.826,3.897 R1.2
NetD6_2: D6.2 R2.1 | length 1.5
  Top Layer w0.2: D6.2 0.276,-0.825 R2.1
pads on no net: EC1. SW1.3 U1.4 U2.4 U2.7

## Polygon pours and split planes (outlines as drawn)
no net on Bottom Assy "NONET_L-01_P-001" (hatched 45Degree grid 0.15 track 0.01): -7.5,3.347 ccw(c-5,5.006) -3.342,7.506 -5,7.506 ccw(c-5,5.006) -7.5,5.006
no net on Bottom Assy "NONET_L-01_P-001" (hatched 45Degree grid 0.15 track 0.01): -7.5,-8.342 cw(c-5,-10) -3.342,-12.5 -5,-12.5 cw(c-5,-10) -7.5,-10
no net on Bottom Assy "NONET_L-01_P-001" (hatched 45Degree grid 0.15 track 0.01): -7.5,8.342 ccw(c-5,10) -3.342,12.5 -5,12.5 ccw(c-5,10) -7.5,10
no net on Bottom Assy "NONET_L-01_P-001" (hatched 45Degree grid 0.15 track 0.01): -4.3,-2.868 -8.2,-2.868 cw(c-8.2,-2.468) -8.6,-2.468 -8.6,-2.466 -8.6,2.477 -8.6,2.474 cw(c-8.2,2.474) -8.2,2.874 -8.198,2.874 -4.3,2.874
no net on Bottom Assy "NONET_L-01_P-001" (hatched 45Degree grid 0.15 track 0.01): -7.5,-3.342 cw(c-5,-5) -3.342,-7.5 -5,-7.5 cw(c-5,-5) -7.5,-5
no net on Bottom Assy "NONET_L-01_P-001" (hatched 45Degree grid 0.15 track 0.01): 3.342,-12.5 cw(c5,-10) 7.5,-8.342 7.5,-10 cw(c5,-10) 5,-12.5
no net on Bottom Assy "NONET_L-01_P-001" (hatched 45Degree grid 0.15 track 0.01): 7.5,8.342 cw(c5,10) 3.342,12.5 5,12.5 cw(c5,10) 7.5,10
no net on Fabrication Notes "NONET_L-01_P-001" (hatched 45Degree grid 0.6 track 0.01): -9.5,-7 -3,-7 -2.988,-7 -2.989,7.01 -3,7 -9.5,7 -9.489,7.01
no net on Bottom Assy "NONET_L-01_P-001" (hatched 45Degree grid 0.3 track 0.01): -1.05,11 -1.046,11.109 ccw(c-1.5,12) -0.5,12 -0.5,12.25 cw(c-0.25,12.25) -0.25,12.5 5,12.5 cw(c5,10) 7.5,10 7.5,6.878 cw(c5,10) 1.127,11
no net on Bottom Assy "NONET_L-01_P-001" (hatched 45Degree grid 0.3 track 0.01): -7.5,-10 -7.5,-7.018 -7.5,-7 cw(c-6.5,-7) -6.5,-6 -4.1,-6 ccw(c-4.1,-5) -3.1,-5 -3.1,-4.3 ccw(c-4.1,-4.3) -4.1,-3.3 -8.2,-3.3 cw(c-8.2,-2.5) -9,-2.5 -9,2.5 cw(c-8.2,2.5) -8.2,3.3 -4.1,3.3 ccw(c-4.1,4.3) -3.1,4.3 -3.1,5 ccw(c-4.1,5) -4.1,6 -6.5,6 cw(c-6.5,7) -7.5,7 -7.5,7.003 -7.5,10 cw(c-5,10) -5,12.5 -2.729,12.5 -2.75,12.5 cw(c-2.75,12.25) -2.5,12.25 -2.5,12 ccw(c-1.5,12) -1.5,11 -1.127,11 cw(c-5,10) -1.999,7.355 -2,7.355 -2,-7.355 cw(c-5,-10) -1.127,-11 1.127,-11 cw(c5,-10) 7.5,-6.878 7.5,-10 cw(c5,-10) 5,-12.5 -2.729,-12.5 -5,-12.5 cw(c-5,-10)

## Keep-outs
Keep-Out Layer:
  region: 7.5,11 7.5,12.5 -7.6,12.5 -7.6,11
  region: 7.5,-12.5 7.5,-11 -7.5,-11 -7.5,-12.5

## Other copper
Top Layer:
  region net JD_PWR: -6.802,-6.26 ccw(c-4.999,-4.999) -3.158,-6.203 -3.158,-6.202 -3.827,-6.202 cw(c-5,-5) -6.173,-6.202 -6.175,-6.201 -6.5,-6.201 ccw(c-6.5,-7)
  region net JD_DATA: -6.802,6.26 cw(c-4.999,4.999) -3.158,6.203 -3.158,6.202 -3.827,6.202 ccw(c-5,5) -6.173,6.202 -6.175,6.201 -6.5,6.201 cw(c-6.5,7)
  region net JD_DATA: -7.2,7.8 -4.9,7.8 -2.8,9.9 -2.8,12.2 -5,12.2 -7.2,10
  text "GTL - Top Layer" at -17.836,-16.25 h1.7
Bottom Layer:
  region net JD_PWR: -6.802,-6.26 ccw(c-4.999,-4.999) -3.158,-6.203 -3.158,-6.202 -3.827,-6.202 cw(c-5,-5) -6.173,-6.202 -6.175,-6.201 -6.5,-6.201 ccw(c-6.5,-7)
  region net JD_DATA: -6.802,6.26 cw(c-4.999,4.999) -3.158,6.203 -3.158,6.202 -3.827,6.202 ccw(c-5,5) -6.173,6.202 -6.175,6.201 -6.5,6.201 cw(c-6.5,7)
  text "GBL - Bottom Layer" at -17.836,-17.75 h1.7

## Silkscreen, mask and mechanical layers (free items; w line width, h text height)
Top Overlay:
  text "MSR / Tact" at -3.547,-12.3 h0.9
  text "GTO - Top Overlay" at -2.336,-19.286 h1.7
Bottom Overlay:
  region: -0.087,-3.75 -0.087,-2.3 -1.862,-2.3 -1.862,-3.75
  text "'.ProjectCodenameID'-'.ProjectRevision'" at -0.5,3.35 h1 r90
  text "GBO - Bottom Overlay" at -2.336,-20.786 h1.7
Top Paste:
  text "GTP - Top Paste" at 11.864,-16.25 h1.7
Bottom Paste:
  text "GBP - Bottom Paste" at 11.864,-17.75 h1.7
Top Solder:
  region: -3.913,5.982 -2.846,6.787 -2.855,6.8 cw(c-5,5) -2.2,5 -2.2,4.218 cw(c-3.118,4.218) -3.118,3.3 -4.095,3.3
  region: -3.913,-5.982 -2.846,-6.787 -2.855,-6.8 ccw(c-5,-5) -2.2,-5 -2.2,-4.218 ccw(c-3.118,-4.218) -3.118,-3.3 -4.095,-3.3
  lines w0.01: -3.913,-5.982 -2.846,-6.787 ; -3.905,-5.981 -4.095,-3.3 -3.118,-3.3 cw(c-3.118,-4.218) -2.2,-4.218 -2.2,-5 cw(c-5,-5) -2.855,-6.8
  text "GTS - Top Solder (resist)" at 11.864,-19.286 h1.7
Bottom Solder:
  region: -3.913,5.982 -2.846,6.787 -2.855,6.8 cw(c-5,5) -2.2,5 -2.2,4.218 cw(c-3.118,4.218) -3.118,3.3 -4.095,3.3
  region: -3.913,-5.982 -2.846,-6.787 -2.855,-6.8 ccw(c-5,-5) -2.2,-5 -2.2,-4.218 ccw(c-3.118,-4.218) -3.118,-3.3 -4.095,-3.3
  text "GBS - Bottom Solder (resist)" at 11.864,-20.786 h1.7
Mechanical 1:
  lines w0.01: -6.802,-6.262 ccw(c-5,-5) -3.158,-6.203 ; -6.802,-6.26 cw(c-6.5,-7) -6.5,-6.201 ; -6.5,-6.201 -6.175,-6.201 ; -6.173,-6.202 ccw(c-5,-5) -3.827,-6.202 -3.158,-6.202
Fabrication Notes:
  lines w0.01: -9.5,-7 -3,-7 ; -9.5,7 -3,7 ; -9.489,7.01 -9.488,-7 ; -2.989,7.01 -2.988,-7
  lines w0.2: -11.25,-0.2 -7.4,-2.5 -5.65,-2.5 ; -11.25,0.2 -7.4,2.5 -5.65,2.5 ; -11.25,6 -9.5,6
  text "GTL - Top Layer" at 11.501,10.072 h1.7
  text "GBL - Bottom Layer" at 11.501,8.572 h1.7
  text "GTO - Top Overlay" at 11.501,7.036 h1.7
  text "GBO - Bottom Overlay" at 11.501,5.536 h1.7
  text "GTP - Top Paste" at 11.501,4.072 h1.7
  text "no board edge pips/ / rat's teeth/mouse bites  / in this region - make  / sure board edge is clean" at -27.397,4 h1.7
  text "GBP - Bottom Paste" at 11.501,2.572 h1.7
  text "GTS - Top Solder (resist)" at 11.501,1.036 h1.7
  text "non-plated slots x2" at -22.299,-0.407 h1.7
  text "GBS - Bottom Solder (resist)" at 11.501,-0.464 h1.7
  text "GM3 - Fabrication Notes" at 11.501,-1.964 h1.7
  text "GM6 - Board Outline Only" at 11.501,-3.464 h1.7
  text "GM9 - V Score" at 11.501,-4.928 h1.7
  text "GM11 - Board Outline + Cutouts" at 11.501,-6.464 h1.7
  text "GM15 - Top Assy" at 11.501,-7.933 h1.7
  text "GM16 - Bottom Assy" at 11.501,-9.433 h1.7
  text "GM3 - Fabrication Notes" at -17.836,-19.286 h1.7
Route Tool Path:
  lines w2: -6.069,5.001 -6.072,5.001 ; -5,-13.5 cw(c-5,-10) -8.5,-10 -8.5,-7.006 ; -1.5,12 -1.5,12.125 ; -0.255,13.5 ccw(c-0.25,12.25) -1.5,12.258 ccw(c-2.75,12.25) -2.745,13.5 -5.003,13.5 ccw(c-5,10) -8.5,10 ; 5,13.5 cw(c5,10) 8.5,10.035 ; -8.5,-7.006 cw(c-7.5,-7) -8.5,-6.999 ; -8.5,-7.005 cw(c-7.5,-7) -8.5,-7 cw(c-6.5,-7) -8.5,-6.999 ; -8.5,-7.005 -8.5,-6.993 ; -8.5,-7.006 -8.5,-7.005 ; -8.5,-6.999 cw(c-6.5,-7) -8.5,-6.993 ; -8.5,-6.999 -8.5,-6.969 ; -8.5,-6.993 -8.5,-6.97 ; -8.5,-6.969 cw(c-7.5,-6.97) -8.497,-6.898 ; -8.5,-6.969 ccw(c-7.5,-6.97) -8.5,-6.97 ; -8.5,-6.969 cw(c-7.5,-6.97) -8.497,-6.898 ; -8.5,6.969 ccw(c-7.5,6.97) -8.497,6.898 ; -8.5,6.97 ccw(c-7.5,6.97) -8.5,6.969 ; -8.5,6.969 ccw(c-7.5,6.97) -8.497,6.898 ; -8.5,6.969 -8.5,6.999 ; -8.5,6.97 -8.5,6.993 ; -8.5,6.993 cw(c-6.5,7) -8.5,6.999 ; -8.5,6.993 -8.5,7.005 ; -8.5,6.999 cw(c-7.5,7) -8.5,7.006 ; -8.5,7 cw(c-7.5,7) -8.5,7.005 ; -8.5,7 ccw(c-6.5,7) -8.5,6.999 ; -8.5,7.006 -8.5,10 ; -8.5,7.005 -8.5,7.006 ; -8.5,10 -8.5,10 ; -8.5,10 -8.5,10 ; -8.497,-6.898 cw(c-6.5,-7) -6.503,-5 ; -8.497,6.898 ccw(c-6.5,7) -6.503,5 ; -8.203,4.3 ccw(c-8.2,2.5) -10,2.5 -10,-2.5 ccw(c-8.2,-2.5) -8.2,-4.3 ; -8.203,4.3 cw(c-8.2,2.5) -8.2,4.3 ; -8.203,4.3 cw(c-8.2,3.3) -8.2,4.3 ; -8.2,-4.3 ccw(c-8.2,-3.3) -8.194,-4.3 ; -8.2,-4.3 ccw(c-8.2,-3.3) -8.194,-4.3 ; -8.2,-4.3 -8.194,-4.3 ; -8.2,4.3 -4.1,4.3 ; -8.194,-4.3 -4.1,-4.3 ; -6.503,-5 cw(c-6.5,-6) -6.448,-5.001 ; -6.503,-5 cw(c-6.5,-7) -6.5,-5 cw(c-6.5,-6) -6.448,-5.001 ; -6.503,5 ccw(c-6.5,6) -6.448,5.001 ; -6.503,5 ccw(c-6.5,7) -6.5,5 ccw(c-6.5,6) -6.448,5.001 ; -6.448,-5.001 -6.069,-5.001 ; -6.448,-5.001 -6.448,-5.001 ; -6.448,5.001 -6.072,5.001 ; -6.448,5.001 -6.448,5.001 ; -6.072,5.001 ccw(c-6.069,6.001) -5.339,5.318 cw(c-5,5) -4.713,5.366 ; -6.069,-5.001 cw(c-6.069,-6.001) -5.339,-5.318 ccw(c-5,-5) -5.339,-5.319 ; -6.069,-5.001 cw(c-6.069,-6.001) -5.339,-5.319 ; -5.339,-5.319 ccw(c-5,-5) -4.713,-5.366 ; -4.713,-5.366 cw(c-4.01,-6.077) -4.491,-5.2 ; -4.713,-5.366 cw(c-4.01,-6.077) -4.491,-5.2 ; -4.713,5.366 ccw(c-4.01,6.077) -4.49,5.2 ; -4.713,5.366 ccw(c-4.01,6.077) -4.49,5.2 ; -4.491,-5.2 -4.241,-5.063 ; -4.49,5.2 -4.242,5.064 ; -4.241,-5.063 cw(c-3.76,-5.94) -4.107,-5.002 ; -4.241,-5.063 -4.241,-5.063 cw(c-3.76,-5.94) -4.107,-5.002 ; -4.242,5.064 ccw(c-3.76,5.94) -4.107,5.002 ; -4.242,5.064 -4.24,5.063 ccw(c-3.76,5.94) -4.107,5.002 ; -4.107,-5.002 cw(c-3.107,-5.007) -4.107,-4.995 ; -4.107,-5.002 cw(c-3.107,-5.007) -4.107,-4.997 -4.107,-4.995 ; -4.107,-4.995 -4.1,-4.3 ; -4.107,5.002 ccw(c-3.107,5.007) -4.1,4.892 ; -4.107,5.002 ccw(c-3.107,5.007) -4.1,4.892 ; -4.1,-4.3 ccw(c-4.1,-3.3) -4.1,-4.3 ; -4.1,-4.3 ccw(c-4.1,-3.3) -4.1,-4.3 ; -4.1,-4.3 -4.1,-4.3 ; -4.1,4.3 cw(c-4.1,3.3) -4.1,4.3 ; -4.1,4.3 cw(c-4.098,3.3) -4.1,4.3 ; -4.1,4.3 cw(c-4.1,3.3) -4.1,4.3 ; -4.1,-4.3 ccw(c-4.1,-3.3) -4.1,-4.3 ; -4.1,-4.3 ccw(c-4.1,-3.3) -4.1,-4.3 ; -4.1,4.3 -4.1,4.892 ; -4.1,4.3 -4.1,4.3 ; -4.1,4.892 -4.1,4.892 ; 5,-13.5 ccw(c5,-10) 8.5,-10.035 ; 5,-13.5 5,-13.5 ; 8.5,-10.035 ccw(c7.5,-10) 8.5,-10 ; 8.5,-10.035 ccw(c7.5,-10) 8.5,-10 ; 8.5,-10 8.5,10 ; 8.5,10 ccw(c7.5,10) 8.5,10.035 ; 8.5,10 ccw(c7.5,10) 8.5,10.035
Top Component Center:
  text "GM6 - Board Outline Only" at -17.836,-20.785 h1.7
Mechanical 9:
  text "GM9 - V Score" at 11.864,-22.249 h1.7
Board Outline:
  lines w0.1: -7.5,-7 cw(c-6.5,-7) -6.5,-6 ; -7.5,-6.97 -7.5,-10 ccw(c-5,-10) -5,-12.5 5,-12.5 ccw(c5,-10) 7.5,-10 ; -7.5,6.97 -7.5,10 cw(c-5,10) -5,12.5 -2.75,12.5 cw(c-2.75,12.25) -2.5,12.25 -2.5,12 ccw(c-1.5,12) -0.5,12 -0.5,12.25 cw(c-0.25,12.25) -0.25,12.5 5,12.5 cw(c5,10) 7.5,10 ; -7.5,7 ccw(c-6.5,7) -6.5,6 ; -6.5,-6.001 -6.069,-6.001 ccw(c-5,-5) -4.009,-6.079 ; -6.5,6.001 -6.069,6.001 cw(c-5,5) -4.009,6.079 ; -4.1,-3.3 -8.2,-3.3 cw(c-8.2,-2.5) -9,-2.5 -9,2.5 cw(c-8.2,2.5) -8.2,3.3 -4.1,3.3 ; -4.1,-3.3 cw(c-4.1,-4.3) -3.1,-4.3 -3.107,-5.007 cw(c-4.099,-5.007) -3.76,-5.94 -4.01,-6.077 ; -4.098,3.3 ccw(c-4.098,4.3) -3.098,4.3 ; -4.01,6.077 -3.76,5.94 cw(c-4.099,5.007) -3.107,5.007 ; -3.1,4.3 -3.1,5 ; 7.5,-10 7.5,10
  text "GM11 - Board Outline + Cutouts" at -17.836,-22.285 h1.7
Top Assy:
  text "GM15 - Top Assy" at -2.336,-16.254 h1.7
Bottom Assy:
  text "GM16 - Bottom Assy" at -2.336,-17.754 h1.7
Component Keepout Dwg:
  lines w0.01: -7.5,-7 cw(c-6.5,-7) -6.5,-6 -4.1,-6 ccw(c-4.1,-5) -3.1,-5 -3.1,-4.3 ccw(c-4.1,-4.3) -4.1,-3.3 -8.2,-3.3 cw(c-8.2,-2.5) -9,-2.5 -9,2.5 cw(c-8.2,2.5) -8.2,3.3 -4.1,3.3 ccw(c-4.1,4.3) -3.1,4.3 -3.1,5 ccw(c-4.1,5) -4.1,6 -6.5,6 cw(c-6.5,7) -7.5,7
  lines w0.025: -7.5,-7.018 -7.5,-10 ccw(c-5,-10) -5,-12.5 -2.729,-12.5 5,-12.5 ccw(c5,-10) 7.5,-10 7.501,-6.878 ccw(c5,-10) 1.127,-11 -1.127,-11 ccw(c-5,-10) -2,-7.355 -2,7.355 ; -7.5,7.003 -7.5,10 cw(c-5,10) -5,12.5 -2.729,12.5 ; -2.75,12.5 cw(c-2.75,12.25) -2.5,12.25 -2.5,12 ccw(c-1.5,12) -1.5,11 -1.127,11 cw(c-5,10) -1.999,7.355 ; -1.05,11 1.127,11 ccw(c5,10) 7.5,6.878 7.5,10 ccw(c5,10) 5,12.5 -0.25,12.5 ccw(c-0.25,12.25) -0.5,12.25 -0.5,12 cw(c-1.5,12) -1.046,11.109 -1.05,11 ; -1,11.134 -1,11.134

## Text inside footprints (layer, text, board x,y; h text height)
EC1: Mechanical 9 "Jacdac / cable connector  / body" at -13.158,-4.821 h1.7 r90
MH2: Top Overlay "-" at 2.886,9.053 h3.5 r105; Bottom Overlay "-" at 2.886,9.053 h3.5 r105
MH3: Top Overlay "+" at -2.559,-9.873 h2.8 r285; Bottom Overlay "+" at -2.559,-9.873 h2.8 r285
MH4: Top Overlay "-" at 2.696,-9.763 h3.5 r75; Bottom Overlay "-" at 2.696,-9.763 h3.5 r75